# Altium PCB converter 1000v.PcbDoc
Units mm, origin at the board's own origin, x right, y up, seen from the top; angles counter-clockwise.
Board outline 107.01 x 42 mm, 2 copper layers (Top Layer, Bottom Layer), stack 1.671 mm thick; 25 components, 16 nets, 63 pads, 12 vias.
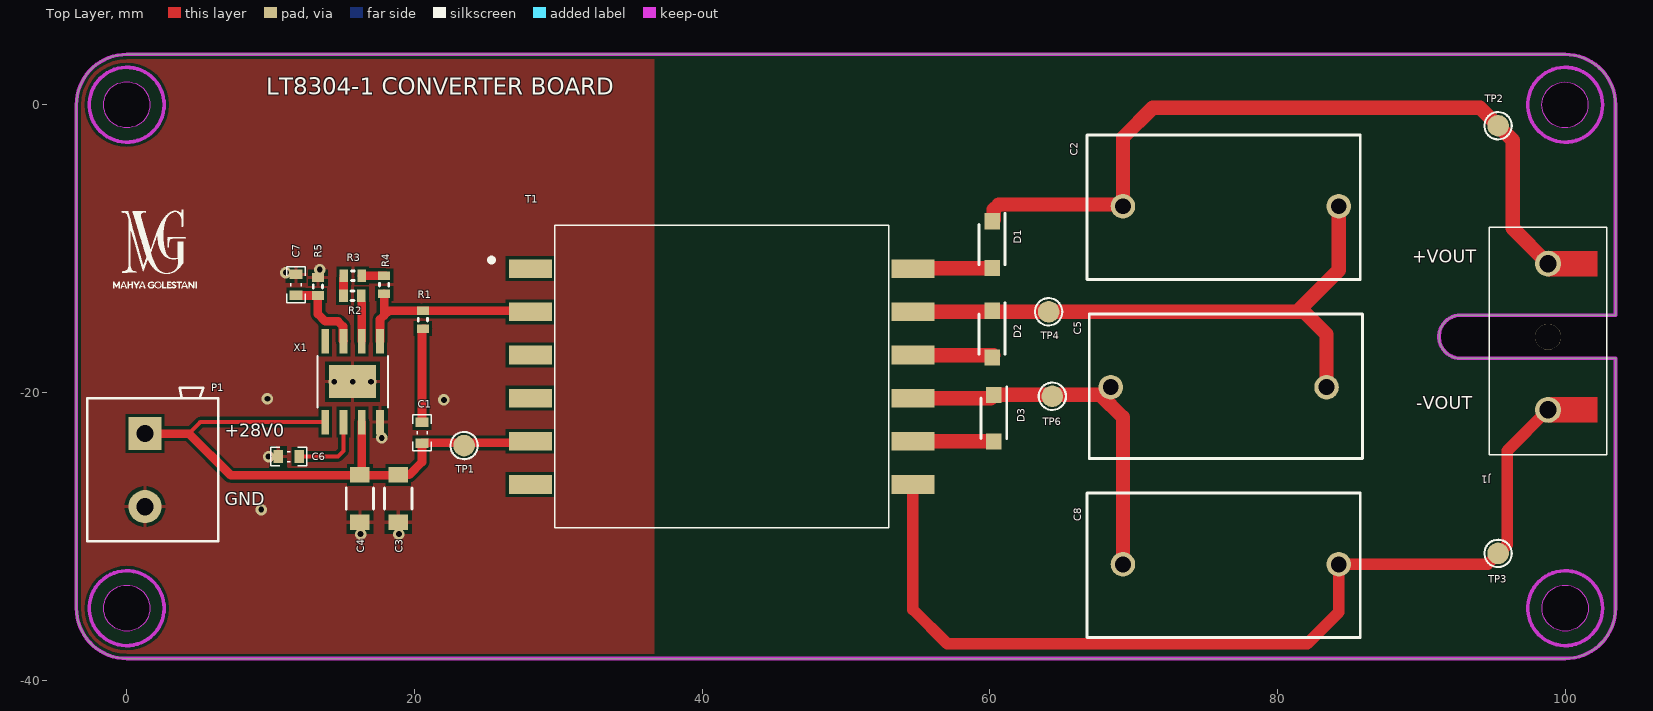
[diagram p0: Top Layer view]
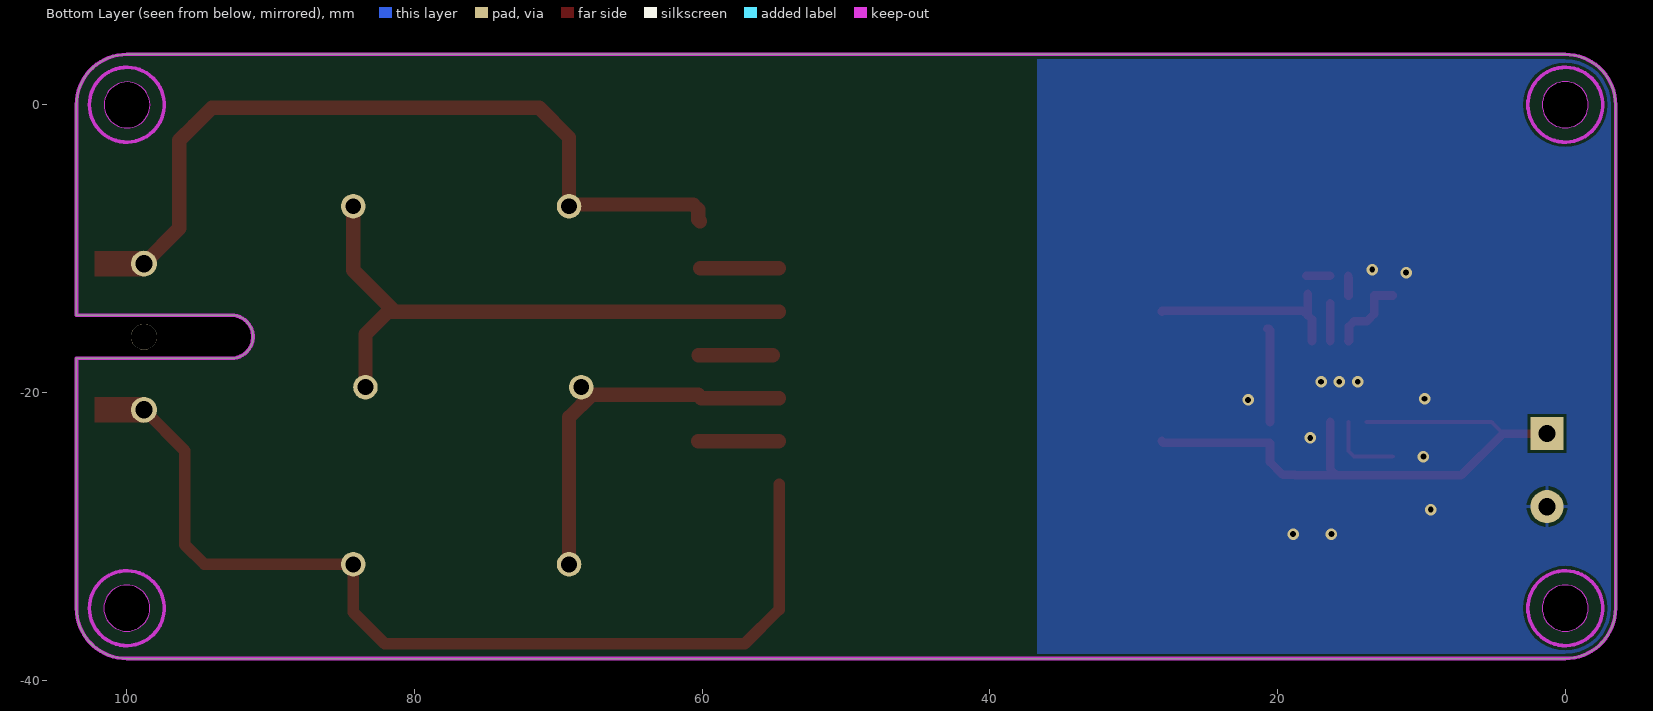
[diagram p1: Bottom Layer view, seen from below]
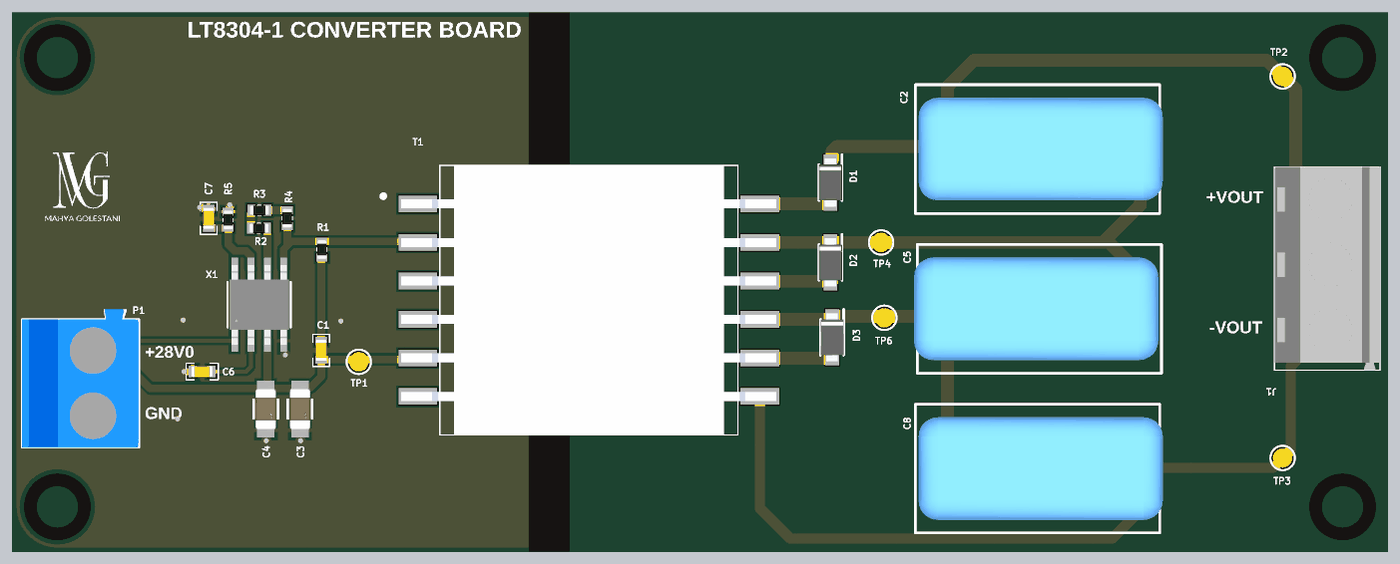
[diagram p2: 3D render of the assembled board from above, using the file's embedded part models]

## Layer stack, top to bottom
Top Solder: solder mask 0.0102, Solder Resist, Dk 3.5
Top Layer: signal copper 0.0356
Dielectric 1: dielectric 1.6, FR-4, Dk 4.8
Bottom Layer: signal copper 0.0356
Bottom Solder: solder mask 0.0102, Solder Resist, Dk 3.5

## Board outline
-3.5,-35 -3.5,0 cw(c0,0) 0,3.5 100,3.5 cw(c100,0) 103.5,0 103.5,-14.624 ccw(c103.505,-14.624) 103.505,-14.629 92.727,-14.629 ccw(c92.727,-16.129) 92.727,-17.629 103.5,-17.629 103.5,-35 cw(c100,-35) 100,-38.5 0,-38.5 cw(c0,-35)
cut-out: 98.385,-0.015 cw(c99.985,-0.015) 99.985,1.585 cw(c99.985,-0.015) 101.585,-0.015 cw(c99.985,-0.015) 99.985,-1.615 cw(c99.985,-0.015)
cut-out: 100,-33.4 cw(c100,-35) 101.6,-35 cw(c100,-35) 100,-36.6 cw(c100,-35) 98.4,-35 cw(c100,-35)
cut-out: 1.6,-35 cw(c0,-35) 0,-36.6 cw(c0,-35) -1.6,-35 cw(c0,-35) 0,-33.4 cw(c0,-35)
cut-out: 0,-1.6 cw(c0,0) -1.6,0 cw(c0,0) 0,1.6 cw(c0,0) 1.6,0 cw(c0,0)

## Design rules (kind name [scope] priority, off if disabled: settings)
Clearance [All] p1: gap=0.2 ignorepadtopadclearanceinfootprint=FALSE
PolygonConnect PolygonConnect_1 [IsVia] p1: connectstyle=Direct reliefconductorwidth=0.254 reliefentries=4 polygonreliefangle="90 Angle" airgapwidth=0.254
PolygonConnect [All] p2: connectstyle=Relief reliefconductorwidth=0.254 reliefentries=4 polygonreliefangle="90 Angle" airgapwidth=0.254
RoutingVias [All] p1: holewidth=0.4 width=0.8 viastyle="Through Hole" minholewidth=0.4 minwidth=0.8 maxholewidth=0.5 maxwidth=1
SolderMaskExpansion [All] p1: expansion=0.102 istentingtop=FALSE
Width [All] p1: maxlimit=3 minlimit=0.254 preferedwidth=0.3
30 further rules are at their usual default settings.

## Components (designator, comment, footprint, x,y, rotation, side; value= is the part's Value field where it differs from the comment)
C1 "270pF" CAP0603 20.53,-22.808 r270 top
C2 "Cap" Cap0.22 84.256,-7.06 r180 top value=0.22uF
C3 "C3216X7R1H106K160AC" FP-C3216-160-0_3-MFG 18.879,-27.379 r270 top
C4 "C3216X7R1H106K160AC" FP-C3216-160-0_3-MFG 16.212,-27.379 r270 top
C5 "Cap" Cap0.22 68.409,-19.633 r0 top value=0.22uF
C6 "100nF" CAP0603 11.259,-24.459 r180 top
C7 "10pF" CAP0603 11.767,-12.521 r90 top
C8 "Cap" Cap0.22 84.256,-31.952 r180 top value=0.22uF
D1 "CMMR1U-08_TR_PBFREE" SODFL3818X108N 60.154,-9.727 r270 top
D2 "CMMR1U-08_TR_PBFREE" SODFL3818X108N 60.154,-15.95 r270 top
D3 "CMMR1U-08_TR_PBFREE" SODFL3818X108N 60.281,-21.792 r270 top
J1 "282837-3" 2828373 98.806,-21.209 r90 top
P1 "Socket Blue 2" "Socket Blue 2" 1.27,-25.4 r270 top
R1 "100R" RES0603_(1608X06L) 20.591,-14.324 r270 top
R2 "280K" RES0603_(1608X06L) 16.314,-13.283 r180 top
R3 "3K" RES0603_(1608X06L) 15.095,-11.886 r0 top
R4 "500R" RES0603_(1608X06L) 17.891,-11.886 r270 top
R5 "10K" RES0603_(1608X06L) 13.291,-12.013 r270 top
T1 "0399-T208" 0399T208 41.358,-18.895 r270 top
TP1 "Ø1.5mm,SMD" TP_SMD_Ø1.5mm 23.451,-23.697 r90 top
TP2 "Ø1.5mm,SMD" TP_SMD_Ø1.5mm 95.333,-1.46 r0 top
TP3 "Ø1.5mm,SMD" TP_SMD_Ø1.5mm 95.333,-31.19 r0 top
TP4 "Ø1.5mm,SMD" TP_SMD_Ø1.5mm 64.091,-14.395 r0 top
TP6 "Ø1.5mm,SMD" TP_SMD_Ø1.5mm 64.345,-20.268 r0 top
X1 "LT8304_2" S_8E_ADI-M 15.704,-19.252 r90 top

## Footprints (in the part's own frame and the unit in brackets; to place one, negate y for a bottom-side part, rotate by r counter-clockwise, add the part's x,y. Pads: shape width x height; smd on the part's side, far side on the other; paste and mask are expansions set on the pad)
0399T208 [mm]
  rect 1.3x3 smd: 1(-7.5,-13.3) 2(-4.5,-13.3) 3(-1.5,-13.3) 4(1.5,-13.3) 5(4.5,-13.3) 6(7.5,-13.3) 7(7.5,13.3) 8(4.5,13.3) 9(1.5,13.3) 10(-1.5,13.3) 11(-4.5,13.3) 12(-7.5,13.3)
  silkscreen extent -10.5,-16.1 10.5,11.6, body extent -10.5,-14.6 10.5,14.6, height 11.6
2828373 [mm]
  round 1.8 hole 1.2: 1(0,0) 3(10.16,0)
  round 1.8 hole 1.8: 2(5.08,0)
  silkscreen extent -3.14,-4.1 12.7,4.1, body extent -3.14,-4.1 12.7,4.1, height 9.97
Cap0.22 [mm]
  round 1.7 hole 1.1: 1(0,0) 2(15,0)
  silkscreen extent -1.5,-4.95 17.5,5.08, body extent -1.75,-3.94 17.25,4.06, height 16
CAP0603 [mm] "Chip Capacitor, 2-Leads, Body 1/60x0/80mm, IPC Medium Density DESIGNER:ABBAS BASEREH"
  rect 0.65x0.9 smd: 1(-0.725,0) 2(0.725,0)
  silkscreen extent -1.25,-0.65 1.25,0.65, body extent -0.82,-0.43 0.82,0.43, height 0.4
FP-C3216-160-0_3-MFG [mm]
  rect 1.1x1.35 smd paste+0 mask+0: 1(-1.65,0) 2(1.65,0)
  silkscreen extent -0.72,-0.95 0.72,0.95, body extent -2.3,-1.05 2.3,1.05, height 0.25
RES0603_(1608X06L) [mm] "Chip Resistor, 2-Leads, Body 1.6x0.8mm, IPC High Density _ (0.063W)"
  rect 0.6x0.85 smd: 1(0,0) 2(1.244,0)
  silkscreen extent 0.52,-0.33 0.72,0.33, body extent -0.14,-0.38 1.38,0.38, height 0.45
S_8E_ADI-M [mil]
  rect 67x21 smd paste+0 mask+0: 1(-110.5,75) 2(-110.5,25) 3(-110.5,-25) 4(-110.5,-75) 5(110.5,-75) 6(110.5,-25) 7(110.5,25) 8(110.5,75)
  rect 90x129 smd paste-64 mask+0: 9(0,0)
  silkscreen extent -70,-96 70,96, body extent -122,-91 122,91, height 69
"Socket Blue 2" [mm] "(Make www.tarahiboard.com)"
  rect 2.3x2.3 hole 1.2: 1(-2.54,0)
  round 2.3 hole 1.2: 2(2.54,0)
  silkscreen extent -5.72,-4.01 4.95,5.08, body extent -5.79,-4.01 4.95,5.05, height 12.52
SODFL3818X108N [mm]
  rect 1.12x1.08 smd: 1(-1.625,0) 2(1.625,0)
  silkscreen extent -2.18,-0.9 1.4,0.9, body extent -1.88,-0.9 1.88,0.9, height 1.08
TP_SMD_Ø1.5mm [mm]
  round 1.5 smd paste-5: 1(0,0)
  silkscreen extent -0.95,-0.95 0.95,0.95

## Part data
C1 C6 C7: library part "CAP SMD PACKAGE", "TOTAL CAPACITOR SMD PACK", Data=2017-3-10, Desc.="CAP SMD TOTAL PACKAGES", Designer="Abbas Basereh"
C2 C5 C8: "Capacitor", LatestRevisionDate=17-Jul-2002, LatestRevisionNote="Re-released for DXP Platform.", PackageDescription="Radial Cap, Thru-Hole; 2 Leads; 0.3 in Pin Spacing", PackageReference=RAD-0.3, Published=8-Jun-2000, Publisher="Altium Limited"
C3 C4: library part CMP-08246-004811-1, "Multilayer Ceramic Capacitors 10uF ±10% 50V X7R SMD 1206", RoHS Compliant=Yes
D1 D2 D3: "Schottky Diode", Arrow Part Number="CMMR1U-08 TR PBFREE", Manufacturer_Name="Central Semiconductor", Mouser Part Number=610-CMMR1U-08TR, Arrow Price/Stock=https://www.arrow.com/en/products/cmmr1u-08-tr-pbfree/central-semiconductor?utm_currency=USD&region=nac, Datasheet Link=https://my.centralsemi.com/get_document.php?cmp=1&mergetype=pd&mergepath=pd&pdf_id=CMMR1U_SERIES.PDF, Height=1.08mm, Manufacturer_Part_Number="CMMR1U-08 TR PBFREE", Mouser Price/Stock=https://www.mouser.co.uk/ProductDetail/Central-Semiconductor/CMMR1U-08-TR-PBFREE?qs=u16ybLDytRacktF8B597og%3D%3D
J1: "Connector", Manufacturer_Name="TE Connectivity", Mouser Part Number=571-2828373, Arrow Part Number=282837-3, Arrow Price/Stock=https://www.arrow.com/en/products/282837-3/te-connectivity?utm_currency=USD&region=europe, Datasheet Link=https://www.te.com/commerce/DocumentDelivery/DDEController?Action=srchrtrv&DocNm=1-1773458-1_EURO_STYLE_QRG&DocType=Data%20Sheet&DocLang=English&PartCntxt=282837-3&DocFormat=pdf, Height=10.3mm, Manufacturer_Part_Number=282837-3, Mouser Price/Stock=https://www.mouser.co.uk/ProductDetail/TE-Connectivity/282837-3?qs=A%252Bip%252BNCYi6PMRxtBYEOSrQ%3D%3D
R1 R2 R3 R4 R5: library part "RES SMD PACKAGE", "TOTAL SMD RESISTOR PACK", Data=2017-3-10, Desc.="RES SMD PAKAGES", Designer="Abbas Basereh"
T1: "Transformer", Manufacturer_Name=Sumida, Arrow Part Number=0399-T208, Arrow Price/Stock=https://www.arrow.com/en/products/0399-t208/sumida?utm_currency=USD&region=nac, Datasheet Link=https://products.sumida.com/products/pdf/CEFD2010(0399-T208)_Ver1.0_E.pdf, Height=11.8mm, Manufacturer_Part_Number=0399-T208
TP1 TP2 TP3 TP4 TP6: library part TP_SMD_Ø1.5MM, "1.5mm circular SMD testpad", Manufacturer="Nordic Semiconductor", Manufacturer Part Number=N.A., Artikkelnr Noca=N.A., Component Class=Connectors, ComponentLink1Description=Datasheet, ComponentLink1URL=N.A., ComponentLink2Description="Supplier link", ComponentLink2URL=N.A., Footprint Doc=TP_SMD_Ø1.5mm, HelpURL=N.A., LatestRevisionDate=2016-06-02, Note=N.A., Pad Count=1, Part Number=TP_SMD_Ø1.5MM, Part number IPS=N.A., PartId=100500477, Published=2016-06-02, Supplier 1=N.A., Supplier 2=N.A., Supplier Part Number 1=N.A., Supplier Part Number 2=N.A.
P1: ComponentLink1Description=Tarahiboard, ComponentLink1URL=https://www.tarahiboard.com/product/library-pack, DatasheetVersion=2022

## Via types
v1: diameter 0.8, hole 0.4, Top Layer to Bottom Layer, tented both sides, 12 vias

## Nets (pads, with @x,y where several pads share a name; then routed paths per layer and width w, separated by ;. In a path a pad name is that pad's centre, name@x,y a point inside that pad or via, vN(x,y) a via of type N, cw(c..) or ccw(c..) an arc to the next point about the centre after c; other vN are vias at no path point)
+28V0: C1.2 C3.1 C4.1 P1.1 T1.5 TP1.1 X1.1 X1.3 | length 43.4
  Top Layer w0.3: 4.318,-22.86 5.12,-22.058 X1.1
  Top Layer w0.6: P1.1 4.318,-22.86 7.223,-25.765 7.957,-25.765 C4.1@15.925,-25.765 ; C4.1@16.277,-25.413 C4.1@15.925,-25.765 ; C4.1@16.339,-25.353 X1.3 ; T1.5@28.046,-23.383 T1.5@28.058,-23.371 ; T1.5 27.945,-23.508 20.555,-23.508 C1.2 20.53,-24.84 19.636,-25.734 18.784,-25.734 18.752,-25.765 C4.1@15.925,-25.765
+VOUT: C2.2 D1.1 J1.3 TP2.1 | length 53.3
  Top Layer w1: D1.1 60.281,-7.975 60.281,-7.284 60.633,-6.933 69.129,-6.933 C2.2 69.256,-2.276 71.33,-0.202 94.075,-0.202 TP2.1 96.349,-2.476 96.349,-8.592 J1.3
-VOUT: C8.1 J1.1 T1.7 TP3.1 | length 66.3
  Top Layer w0.8: T1.7 54.658,-35.092 57.032,-37.465 82.073,-37.465 84.256,-35.282 C8.1 94.601,-31.952 95.968,-30.584 95.968,-24.047 J1.1
GND: C3.2 C4.2 C6.2 C7.2 P1.2 R5.1 X1.4 X1.9
  other v1: 16.256,-29.845 18.923,-29.845 9.354,-28.142 9.862,-24.459 17.736,-23.163 22.054,-20.522 9.779,-20.447 14.434,-19.252 15.704,-19.252 16.974,-19.252 11.063,-11.669 13.418,-11.459
NetC1_1: C1.1 R1.2 | length 6.5
  Top Layer w0.6: C1.1 R1.2@20.53,-15.696 ; R1.2 20.716,-15.569 R1.2@20.718,-15.571
NetC6_1: C6.1 X1.2 | length 5.3
  Top Layer w0.3: C6.1 14.688,-24.459 15.069,-24.078 X1.2
NetC7_1: C7.1 R5.2 X1.7 | length 5.8
  Top Layer w0.6: C7.1@11.982,-13.257 R5.2 13.291,-14.553 13.799,-15.061 14.685,-15.061 15.036,-15.412 15.036,-16.412 X1.7
NetD1_2: D1.2 T1.12 | length 5.6
  Top Layer w0.6: T1.12@54.68,-11.373 T1.12 T1.12@54.713,-11.45 ; D1.2@60.133,-11.373 D1.2
  Top Layer w1: T1.12@54.68,-11.373 D1.2@60.133,-11.373
NetD2_2: D2.2 T1.10 | length 5.2
  Top Layer w0.6: T1.10@55.074,-17.45 T1.10@55.103,-17.421 ; D2.2@60.255,-17.548 D2.2@60.281,-17.575
  Top Layer w1: T1.10@55.103,-17.421 D2.2@60.255,-17.421
NetD3_2: D3.2 T1.8 | length 5.7
  Top Layer w0.6: T1.8@54.669,-23.406 T1.8 T1.8@54.713,-23.34 ; D3.2@60.27,-23.406 D3.2
  Top Layer w1: T1.8@54.669,-23.406 D3.2@60.27,-23.406
NetR1_1: R1.1 R4.2 T1.2 X1.5 | length 13.6
  Top Layer w0.6: X1.5 17.609,-14.934 17.891,-14.652 ; R4.2 17.891,-14.652 ; R1.1@20.403,-14.324 18.219,-14.324 17.891,-14.652 ; R1.1 28.012,-14.324 T1.2@28.058,-14.371
NetR2_1: R2.1 X1.6 | length 2.7
  Top Layer w0.6: X1.6 16.339,-13.791
NetR2_2: R2.2 R3.1 | length 1.4
  Top Layer w0.6: R2.2 15.069,-12.036 15.095,-12.011 R3.1
NetR3_2: R3.2 R4.1 | length 1.7
  Top Layer w0.6: R3.2 R4.1@18.016,-11.886
SEC_1: C2.1 C5.2 D2.1 T1.11 TP4.1 | length 41.6
  Top Layer w1: T1.11 60.154,-14.395 TP4.1 81.363,-14.395 ; C5.2 83.409,-15.964 81.84,-14.395 81.363,-14.395 ; C2.1 84.256,-11.502 81.363,-14.395
SEC_2: C5.1 C8.2 D3.1 T1.9 TP6.1 | length 25.2
  Top Layer w1: T1.9 D3.1@60.053,-20.395 ; D3.1 64.345,-20.167 67.686,-20.167 69.256,-21.737 C8.2
pads on no net: J1.2 T1.1 T1.3 T1.4 T1.6 X1.8

## Polygon pours and split planes (outlines as drawn)
GND on Top Layer "NONET_L-01_P-001" (solid, remove dead copper, pour order 1): -4.616,6.91 -4.616,-43.382 36.659,-43.382 36.659,6.678
GND on Bottom Layer "NONET_L-01_P-001" (solid, remove dead copper, pour order 0): -3.473,3.494 -3.473,-40.08 36.703,-40.08 36.703,3.268

## Keep-outs
Keep-Out Layer:
  circle w0.254: c100,0 r2.6
  circle w0.254: c100,-35 r2.6
  circle w0.254: c0,-35 r2.6
  circle w0.254: c0,0 r2.6
  lines w0.254: 103.5,-17.629 ccw(c103.5,-17.629) 103.5,-17.629 ; 103.5,-17.629 103.5,-35 cw(c100,-35) 100,-38.5 0,-38.5 cw(c0,-35) -3.5,-35 -3.5,0 cw(c0,0) 0,3.5 100,3.5 cw(c100,0) 103.5,0 103.5,-14.624 ccw(c103.505,-14.624) 103.505,-14.629 92.727,-14.629 ccw(c92.727,-16.129) 92.727,-17.629 103.5,-17.629

## Other copper
Top Layer:
  rectangle net -VOUT: 98.806,-22.098 102.235,-20.32
  rectangle net +VOUT: 98.806,-11.938 102.235,-10.16

## Silkscreen, mask and mechanical layers (free items; w line width, h text height)
Top Overlay:
  drawing of 16 lines, arcs and shapes, not listed
  text "LT8304-1 CONVERTER BOARD" at 9.716,0.318 h2
  text "+VOUT" at 89.381,-11.312 h1.5
  text "-VOUT" at 89.635,-21.472 h1.5
  text "+28V0" at 6.801,-23.383 h1.5
  text "GND" at 6.801,-28.151 h1.5
Top Solder:
  circle w1: c100,0 r2.1
  circle w1: c100,-35 r2.1
  circle w1: c0,-35 r2.1
  circle w1: c0,0 r2.1
  rectangle: 36.703,-38.481 39.878,3.556
Bottom Solder:
  circle w1: c100,0 r2.1
  circle w1: c100,-35 r2.1
  circle w1: c0,-35 r2.1
  circle w1: c0,0 r2.1

## Text inside footprints (layer, text, board x,y; h text height)
X1: Mechanical 13 "*" at 14.726,-21.144 h1.27 r90